# EAGLE board Noise Generator (EAGLE 8.2.1)
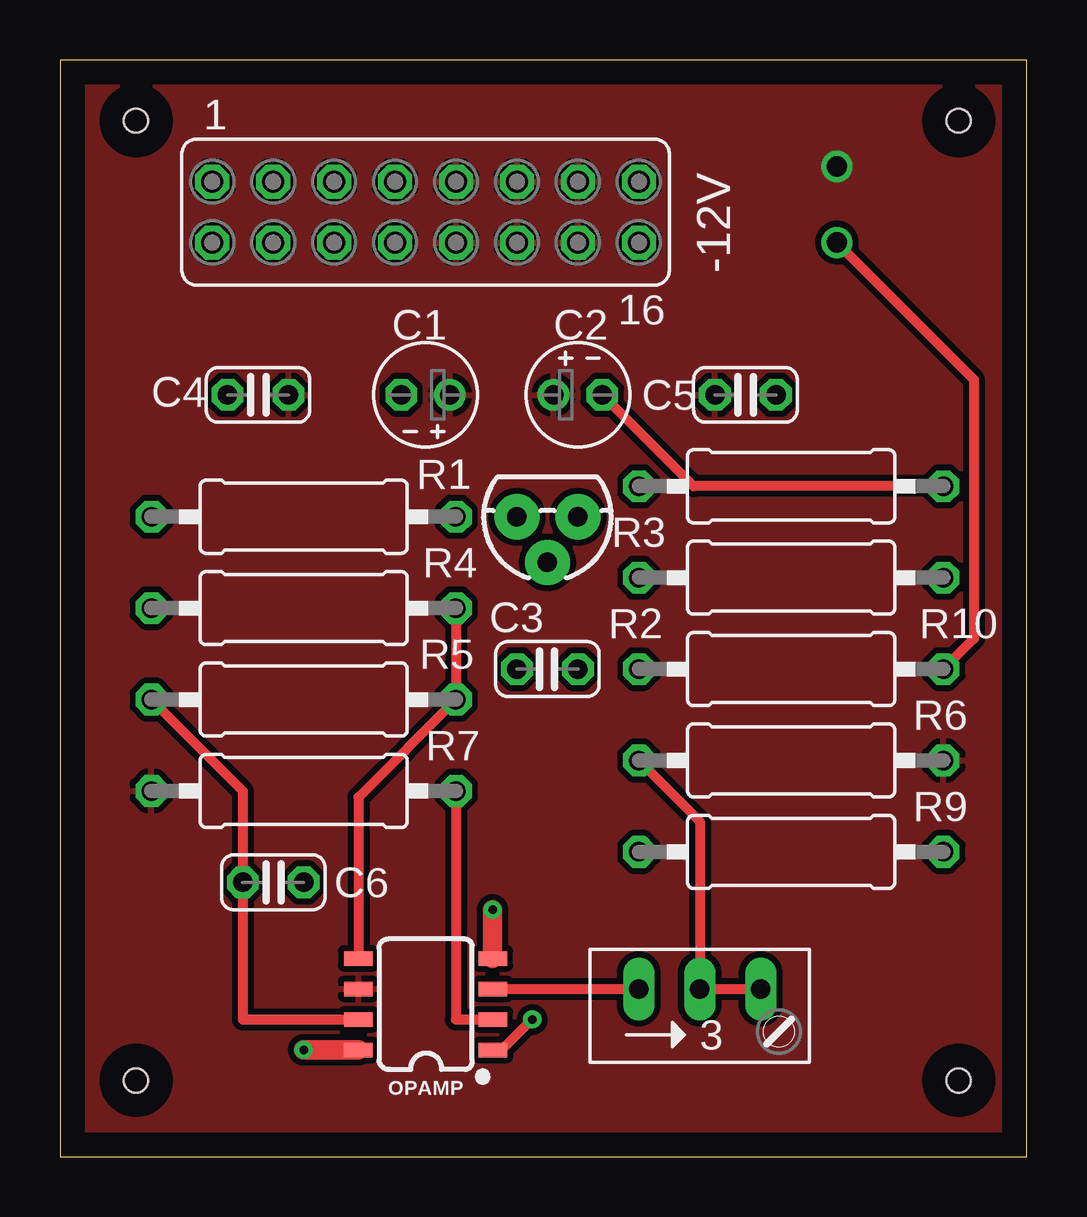
[diagram p0: board, top side]
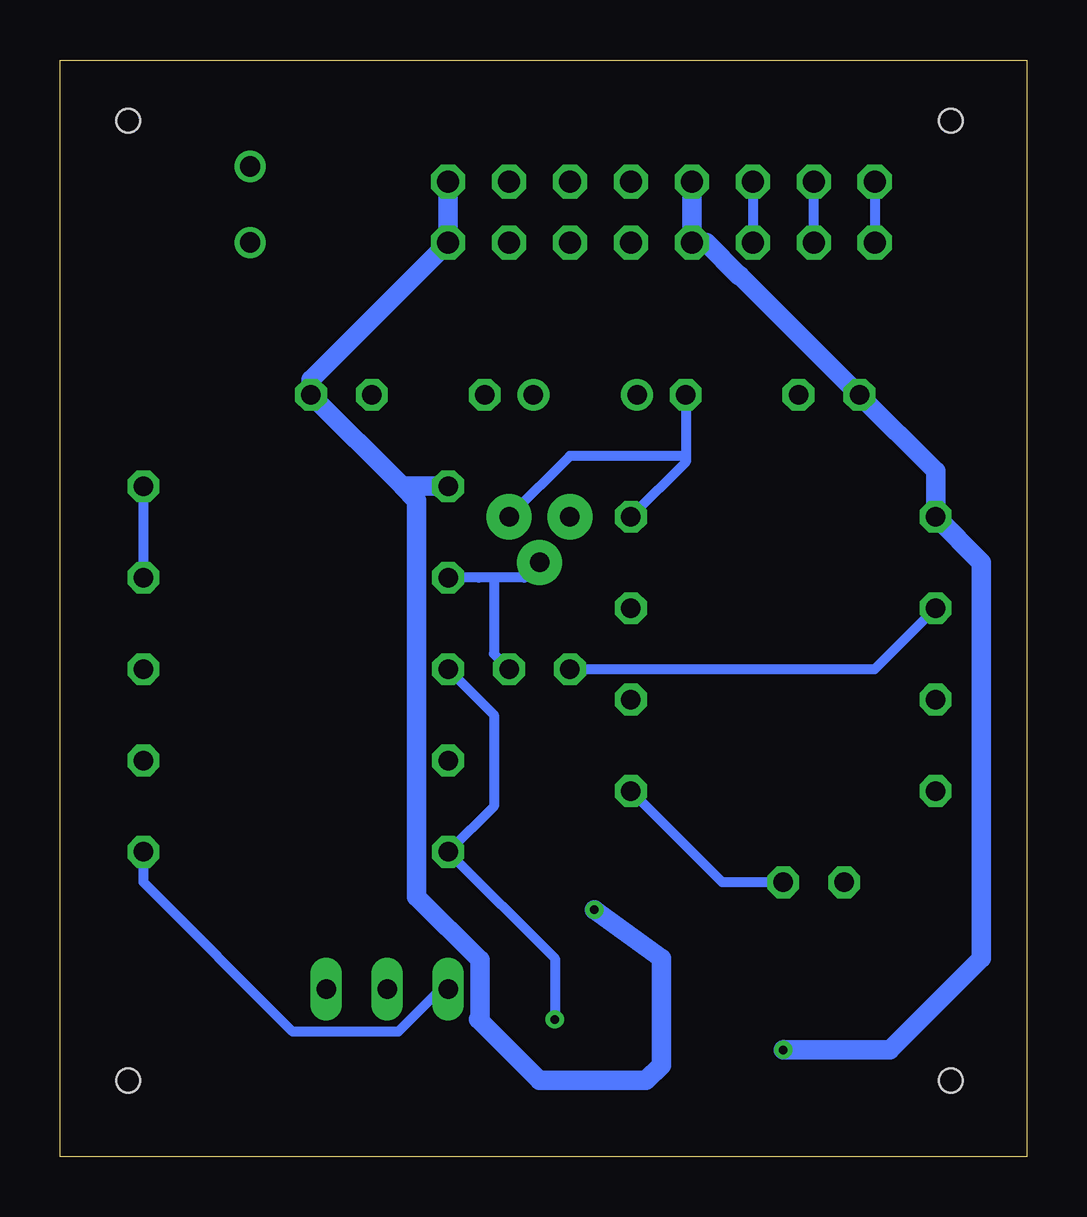
[diagram p1: board, bottom side, seen from below]

Size 40.31 x 45.71 mm. Coordinates in mm from the lower left corner, seen from the top.
Outline: 0,0 40.31,0 40.31,45.71 0,45.71 0,0
Copper layers (1*16): Top 0.035mm / dielectric 1.5mm / Bottom 0.035mm
Design rules "default": minimum track width 6mil, minimum drill 0.35mm, track to track 6mil, track to pad 6mil, pad to pad 6mil, via to via 6mil, smd to smd 6mil, copper to edge 40mil, drill to drill 6mil, minimum pad ring 10mil, minimum via ring 8mil, stop-mask expansion 4mil, vias tented up to drill 0mil, thermal gap 10mil
Net classes: 0 default: width 0.305 mm, drill 0.127 mm, clearance 0.254 mm
Holes 1 mm at 37.47,43.18 37.47,3.17 3.17,3.17 3.17,43.18

## Footprints (pad centres in the part's own frame; a part is rotated, then mirrored left to right if it is on the bottom)
E2-4 = drill 0.813 pad 1.27: + -1.016,0 | drill 0.813 pad 1.27 octagon: - 1.016,0
C025-024X044 = drill 0.813 octagon: 1 -1.27,0; 2 1.27,0
SO08 = smd 0.6 x 1.2: 1 -1.905,-2.8; 2 -0.635,-2.8; 3 0.635,-2.8; 4 1.905,-2.8; 5 1.905,2.8; 6 0.635,2.8; 7 -0.635,2.8; 8 -1.905,2.8
TO-92 = drill 0.813 pad 1.88: 1 -1.27,0; 2 0,1.905; 3 1.27,0
0309/12 = drill 0.813 octagon: 1 -6.35,0; 2 6.35,0
RJ9W = drill 0.813 long: A 2.54,0.635; E -2.54,0.635; S 0,0.635
FE08-2 = drill 0.914 octagon: 1 -8.89,1.27; 2 -8.89,-1.27; 3 -6.35,1.27; 4 -6.35,-1.27; 5 -3.81,1.27; 6 -3.81,-1.27; 7 -1.27,1.27; 8 -1.27,-1.27; 9 1.27,1.27; 10 1.27,-1.27; 11 3.81,1.27; 12 3.81,-1.27; 13 6.35,1.27; 14 6.35,-1.27; 15 8.89,1.27; 16 8.89,-1.27

## Placement (x,y rotation side)
C1  10uF  [E2-4]  15.24,31.75 180 top
C2  10uF  [E2-4]  21.59,31.75 0 top
C3  .1uF  [C025-024X044]  20.32,20.32 180 top
C4  .1uF  [C025-024X044]  8.26,31.75 0 top
C5  .1uF  [C025-024X044]  28.57,31.75 0 top
C6  .1uF  [C025-024X044]  8.89,11.43 0 top
OPAMP  TL072  [SO08]  15.24,6.35 90 top
Q1  2N3904  [TO-92]  20.32,26.67 180 top
R1  470k  [0309/12]  10.16,26.67 180 top
R2  470k  [0309/12]  30.48,24.13 180 top
R3  470k  [0309/12]  30.48,27.94 0 top
R4  20K  [0309/12]  10.16,22.86 0 top
R5  1M  [0309/12]  10.16,19.05 180 top
R6  1K  [0309/12]  30.48,16.51 180 top
R7  100K  [0309/12]  10.16,15.24 0 top
R8  20K  [RJ9W]  26.67,6.35 0 top
R9  100K  [0309/12]  30.48,12.7 180 top
R10  3K  [0309/12]  30.48,20.32 0 top
SV1  [FE08-2]  15.24,39.37 0 top

## Library data of the parts
C1 C2 = rcl
C3-C6 R1-R7 R9 R10 = resistor
OPAMP = SparkFun-IC-Amplifiers; PROD_ID: NA-XXXXX
Q1 = SparkFun-DiscreteSemi; PROD_ID: TRANS-08447
R8 = pot
SV1 = con-lsta; OC_FARNELL: unknown; OC_NEWARK: unknown

## Nets
+5V: SV1.5 SV1.6
+12V: C4.1 OPAMP.8 R1.2 SV1.7 SV1.8
-12V: C5.2 OPAMP.4 R3.1 SV1.15 SV1.16
CV: SV1.3 SV1.4
GATE: SV1.1 SV1.2
GND: C1.+ C2.+ C4.2 C5.1 OPAMP.6 R6.1 R7.1 SV1.9 SV1.10 SV1.11 SV1.12 SV1.13 SV1.14
N$1: C2.- R2.1 R3.2
N$2: C1.- Q1.1 R1.1
N$5: R6.2 R8.A R8.S
N$11: C3.2 R4.1
N$12: C3.1 Q1.2 R2.2
NEG1A: C6.2 OPAMP.2 R7.2
OUT1A: OPAMP.1 R9.2 R10.1
OUT1B: C6.1 OPAMP.7 R5.2
POS1A: OPAMP.3 R8.E R9.1
POS1B: OPAMP.5 R4.2 R5.1
X50: R10.2

## Tracks (layer width: path | path; a pad name or v marks a point on that pad's centre or on a via)
+5V
  Bottom 0.406: SV1.5 SV1.6
+12V  (via drill 0.35)
  Top 0.813: v10.16,4.45 OPAMP.8
  Bottom 0.813: SV1.7 SV1.8 13.37,38.1 12,36.73 11.96,36.73 C4.1 3.81,28.57 R1.2 1.91,24.77 1.91,8.26 5.71,4.45 v10.16,4.45
-12V  (via drill 0.35)
  Top 0.813: v18.03,10.29 OPAMP.4
  Bottom 0.813: SV1.15 SV1.16 29.84,32.38 C5.2 26.04,27.94 | 26.04,27.94 R3.1 | 26.04,27.94 25.45,27.36 25.45,10.83 22.81,8.19 22.81,5.78 22.86,5.73 22.86,5.71 20.32,3.17 15.88,3.17 15.24,3.81 15.24,6.99 15.24,8.26 v18.03,10.29
CV
  Bottom 0.406: SV1.4 SV1.3
GATE
  Bottom 0.406: SV1.1 SV1.2
GND  (via drill 0.85 pad 1.3)
  other vias: 32.38,41.27
  pour Top: 0,45.72 40.64,45.72 40.64,0 0,0
N$1
  Top 0.406: R3.2 26.42,27.94 C2.-
  Bottom 0.406: R2.1 R3.2
N$2
  Bottom 0.406: C1.- 14.22,29.21 | 14.22,29.21 14.22,28.96 R1.1 | 14.22,29.21 19.05,29.21 Q1.1
N$5
  Top 0.406: R6.2 26.67,13.97 R8.S R8.A
N$11
  Bottom 0.406: C3.2 6.35,20.32 R4.1
N$12
  Bottom 0.406: Q1.2 20.95,24.13 22.23,24.13 | 22.23,24.13 22.86,24.13 R2.2 | 22.23,24.13 22.23,20.95 C3.1
NEG1A
  Top 0.406: R7.2 16.51,5.71 OPAMP.2
  Bottom 0.406: C6.2 12.7,11.43 R7.2
OUT1A  (via drill 0.35)
  Top 0.406: OPAMP.1 18.41,4.45 v19.68,5.71
  Bottom 0.406: R10.1 22.23,18.41 22.23,14.61 R9.2 19.68,8.26 v19.68,5.71
OUT1B
  Top 0.406: R5.2 7.62,15.24 C6.1 7.62,5.71 OPAMP.7
POS1A
  Top 0.406: OPAMP.3 R8.E
  Bottom 0.406: R8.E 24.43,6.99 26.21,5.21 30.61,5.21 36.83,11.43 R9.1
POS1B
  Top 0.406: R4.2 R5.1 12.44,14.98 OPAMP.5
X50  (via drill 0.85 pad 1.3)
  Top 0.406: v32.38,38.1 38.1,32.38 38.1,21.59 R10.2

## Text on the board
tNames: -12V